# Altium PCB STM32F302VC_EVM.PcbDoc (part 16 of 19)
Units mil, origin at the board's own origin, x right, y up, seen from the top; angles counter-clockwise.
Board outline 3937.01 x 3937.01 mil, 2 copper layers (Top Layer, Bottom Layer); 117 components, 166 nets, 602 pads, 373 vias.
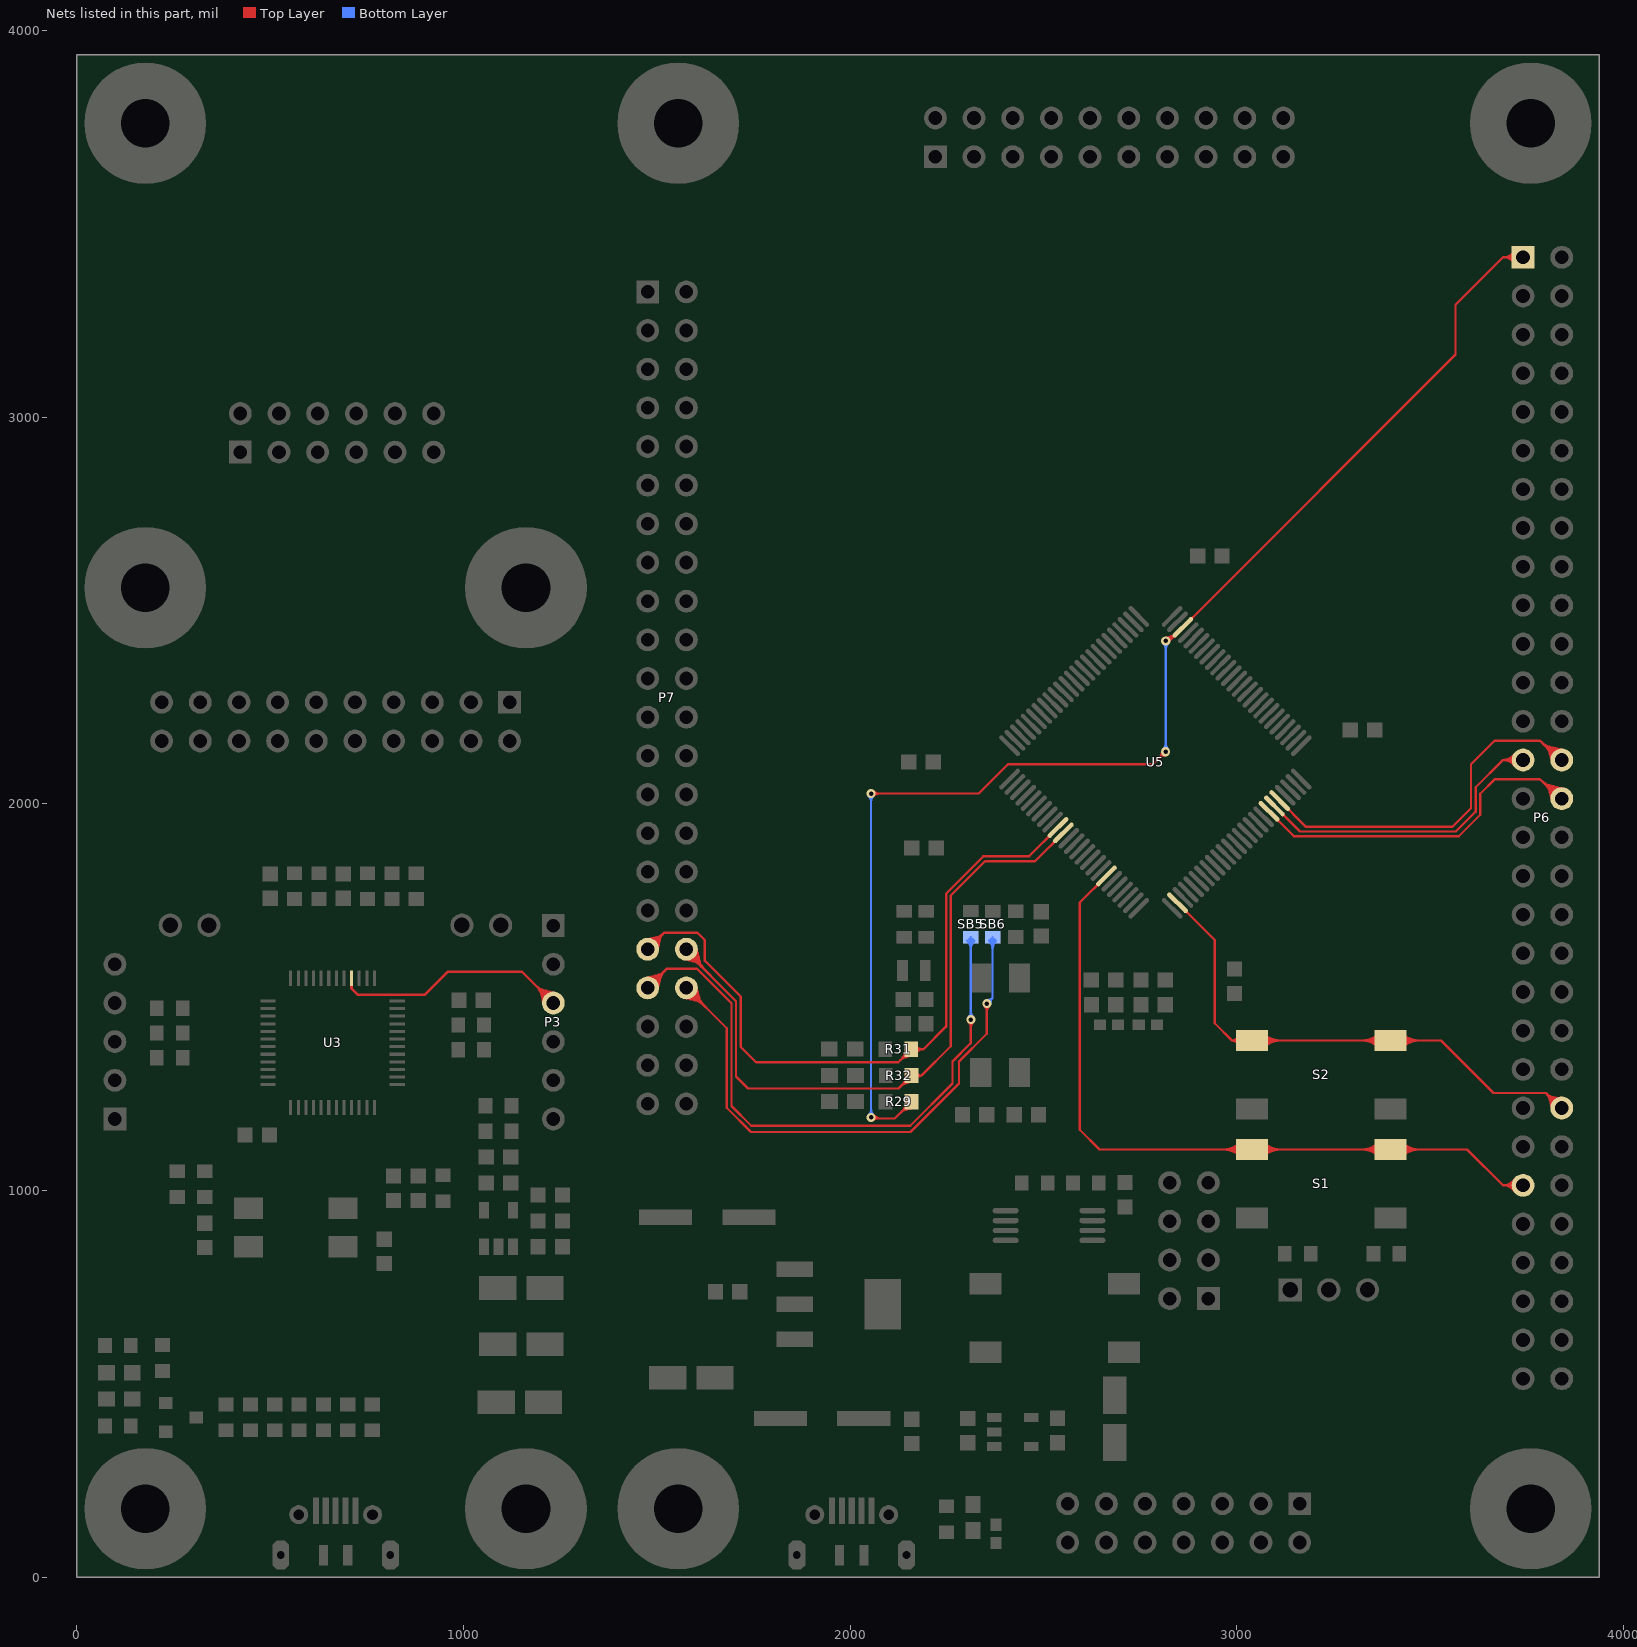
[diagram p16: the nets of this part, all layers, seen from the top]

## Via types
v1: diameter 23.62, hole 11.81, Top Layer to Bottom Layer, tented both sides, 372 vias
v2: diameter 50, hole 28, Top Layer to Bottom Layer, tented both sides, 1 vias

## Nets (pads, with @x,y where several pads share a name; then routed paths per layer and width w, separated by ;. In a path a pad name is that pad's centre, name@x,y a point inside that pad or via, vN(x,y) a via of type N, cw(c..) or ccw(c..) an arc to the next point about the centre after c; other vN are vias at no path point) (continued)
PE13: P6.30 U5.44 | length 2796
  Top Layer w6: U5.44@3083.07,1980.62 3147.35,1916.34 3573.97,1916.34 3629.51,1971.87 3629.51,2026.16 3667.32,2063.98 3783.46,2063.98 P6.30@3837.11,2010.33 ; U5.44@3103.95,1956.83 cw(c3103.95,1949.82) 3108.91,1954.78 ; U5.44@3103.95,1956.83 cw(c3103.95,1949.82) 3108.91,1954.78 ; U5.44@3103.95,1956.83 cw(c3103.95,1949.82) 3108.91,1954.78 ; U5.44@3106.85,1959.74 ccw(c3113.87,1959.74) 3108.91,1954.78 ; U5.44@3106.85,1959.74 ccw(c3113.87,1959.74) 3108.91,1954.78 ; U5.44@3106.85,1959.74 ccw(c3113.87,1959.74) 3108.91,1954.78 ; 3784.45,2062.99 ccw(c3840.16,2118.69) P6.30@3840.16,2039.91 ; 3784.45,2062.99 ccw(c3840.16,2118.69) P6.30@3840.16,2039.91 ; 3784.45,2062.99 ccw(c3840.16,2118.69) P6.30@3840.16,2039.91 ; 3794.7,2052.74 ccw(c3840.16,2098.2) P6.30@3840.16,2033.91 ; 3794.7,2052.74 ccw(c3840.16,2098.2) P6.30@3840.16,2033.91 ; 3794.7,2052.74 ccw(c3840.16,2098.2) P6.30@3840.16,2033.91 ; 3799.19,2048.25 cw(c3764.32,2013.39) P6.30@3813.63,2013.39 ; 3799.19,2048.25 cw(c3764.32,2013.39) P6.30@3813.63,2013.39 ; 3799.19,2048.25 cw(c3764.32,2013.39) P6.30@3813.63,2013.39 ; 3804.94,2042.5 ccw(c3840.16,2077.72) P6.30@3840.16,2027.91 ; 3804.94,2042.5 ccw(c3840.16,2077.72) P6.30@3840.16,2027.91 ; 3804.94,2042.5 ccw(c3840.16,2077.72) P6.30@3840.16,2027.91 ; 3806.97,2038.25 ccw(c3844.2,2048.23) P6.30@3839.76,2009.94 ; 3806.97,2038.25 ccw(c3844.2,2048.23) P6.30@3839.76,2009.94 ; 3806.97,2038.25 ccw(c3844.2,2048.23) P6.30@3839.76,2009.94 ; 3808.64,2048.13 cw(c3796.21,2000.43) P6.30@3843.49,2014.37 ; 3808.64,2048.13 cw(c3796.21,2000.43) P6.30@3843.49,2014.37 ; 3808.64,2048.13 cw(c3796.21,2000.43) P6.30@3843.49,2014.37 ; 3809.25,2029.72 ccw(c3843.11,2038.79) P6.30@3839.07,2003.98 ; 3809.25,2029.72 ccw(c3843.11,2038.79) P6.30@3839.07,2003.98 ; 3809.25,2029.72 ccw(c3843.11,2038.79) P6.30@3839.07,2003.98 ; 3809.43,2038.01 cw(c3784.8,2013.39) P6.30@3819.63,2013.39 ; 3809.43,2038.01 cw(c3784.8,2013.39) P6.30@3819.63,2013.39 ; 3809.43,2038.01 cw(c3784.8,2013.39) P6.30@3819.63,2013.39 ; 3811.32,2041.64 cw(c3801.92,2006.56) P6.30@3837.67,2012.94 ; 3811.32,2041.64 cw(c3801.92,2006.56) P6.30@3837.67,2012.94 ; 3811.32,2041.64 cw(c3801.92,2006.56) P6.30@3837.67,2012.94 ; 3811.54,2021.19 ccw(c3842.01,2029.35) P6.30@3838.37,1998.02 ; 3811.54,2021.19 ccw(c3842.01,2029.35) P6.30@3838.37,1998.02 ; 3811.54,2021.19 ccw(c3842.01,2029.35) P6.30@3838.37,1998.02 ; 3814.65,2034.75 ccw(c3818.83,2050.33) P6.30@3826.89,2036.36 ; 3814.65,2034.75 ccw(c3818.83,2050.33) P6.30@3826.89,2036.36 ; 3814.65,2034.75 ccw(c3818.83,2050.33) P6.30@3826.89,2036.36 ; 3814.86,2034.69 cw(c3809,2012.83) P6.30@3831.63,2013.23 ; 3814.86,2034.69 cw(c3809,2012.83) P6.30@3831.63,2013.23 ; 3814.86,2034.69 cw(c3809,2012.83) P6.30@3831.63,2013.23 ; 3815.18,2032.26 ccw(c3840.16,2057.23) P6.30@3840.16,2021.91 ; 3815.18,2032.26 ccw(c3840.16,2057.23) P6.30@3840.16,2021.91 ; 3815.18,2032.26 ccw(c3840.16,2057.23) P6.30@3840.16,2021.91 ; 3818.91,2045.45 cw(c3808.09,2003.93) P6.30@3849.24,2016.06 ; 3818.91,2045.45 cw(c3808.09,2003.93) P6.30@3849.24,2016.06 ; 3818.91,2045.45 cw(c3808.09,2003.93) P6.30@3849.24,2016.06 ; 3820.43,2039.2 cw(c3812.18,2008.39) P6.30@3843.58,2014 ; 3820.43,2039.2 cw(c3812.18,2008.39) P6.30@3843.58,2014 ; 3820.43,2039.2 cw(c3812.18,2008.39) P6.30@3843.58,2014 ; 3829.18,2042.77 cw(c3819.97,2007.43) P6.30@3855,2017.76 ; 3829.18,2042.77 cw(c3819.97,2007.43) P6.30@3855,2017.76 ; 3829.18,2042.77 cw(c3819.97,2007.43) P6.30@3855,2017.76
PE14: P6.27 U5.45 | length 1198
  Top Layer w6: U5.45@3096.99,1994.54 3163.19,1928.34 3565.94,1928.34 3617.51,1979.9 3617.51,2042.9 3687.99,2113.39 ; P6.27@3740.16,2113.39 3687.99,2113.39 ; U5.45@3117.87,1970.75 cw(c3117.87,1963.74) 3122.83,1968.7 ; U5.45@3117.87,1970.75 cw(c3117.87,1963.74) 3122.83,1968.7 ; U5.45@3117.87,1970.75 cw(c3117.87,1963.74) 3122.83,1968.7 ; U5.45@3120.77,1973.66 ccw(c3127.79,1973.66) 3122.83,1968.7 ; U5.45@3120.77,1973.66 ccw(c3127.79,1973.66) 3122.83,1968.7 ; U5.45@3120.77,1973.66 ccw(c3127.79,1973.66) 3122.83,1968.7 ; 3687.99,2113.39 cw(c3687.99,2075.36) P6.27@3718.72,2097.76 ; 3687.99,2113.39 ccw(c3687.99,2151.41) P6.27@3718.72,2129.01 ; 3687.99,2113.39 ccw(c3687.99,2151.41) P6.27@3718.72,2129.01 ; 3687.99,2113.39 cw(c3687.99,2075.36) P6.27@3718.72,2097.76 ; 3687.99,2113.39 ccw(c3687.99,2151.41) P6.27@3718.72,2129.01 ; 3687.99,2113.39 cw(c3687.99,2075.36) P6.27@3718.72,2097.76 ; 3699.79,2113.39 cw(c3699.79,2083.96) P6.27@3723.57,2101.29 ; 3699.79,2113.39 ccw(c3699.79,2142.81) P6.27@3723.57,2125.48 ; 3699.79,2113.39 ccw(c3699.79,2142.81) P6.27@3723.57,2125.48 ; 3699.79,2113.39 cw(c3699.79,2083.96) P6.27@3723.57,2101.29 ; 3699.79,2113.39 ccw(c3699.79,2142.81) P6.27@3723.57,2125.48 ; 3699.79,2113.39 cw(c3699.79,2083.96) P6.27@3723.57,2101.29
PE15: P6.28 U5.46 | length 2845.5
  Top Layer w6: U5.46@3110.91,2008.46 3179.03,1940.34 3557.09,1940.34 3605.51,1988.76 3605.51,2102.55 3666.34,2163.39 3783.46,2163.39 ; P6.28@3836.81,2110.04 3783.46,2163.39 ; U5.46@3131.79,1984.67 cw(c3131.79,1977.66) 3136.75,1982.62 ; U5.46@3131.79,1984.67 cw(c3131.79,1977.66) 3136.75,1982.62 ; U5.46@3131.79,1984.67 cw(c3131.79,1977.66) 3136.75,1982.62 ; U5.46@3134.69,1987.58 ccw(c3141.71,1987.58) 3136.75,1982.62 ; U5.46@3134.69,1987.58 ccw(c3141.71,1987.58) 3136.75,1982.62 ; U5.46@3134.69,1987.58 ccw(c3141.71,1987.58) 3136.75,1982.62 ; 3783.47,2163.38 ccw(c3840.13,2220.04) P6.28@3840.15,2139.91 ; 3783.47,2163.38 ccw(c3840.13,2220.04) P6.28@3840.15,2139.91 ; 3783.47,2163.38 ccw(c3840.13,2220.04) P6.28@3840.15,2139.91 ; 3793.71,2153.14 ccw(c3840.13,2199.57) P6.28@3840.15,2133.91 ; 3793.71,2153.14 ccw(c3840.13,2199.57) P6.28@3840.15,2133.91 ; 3793.71,2153.14 ccw(c3840.13,2199.57) P6.28@3840.15,2133.91 ; 3799.6,2147.25 cw(c3765.74,2113.39) P6.28@3813.63,2113.39 ; 3799.6,2147.25 cw(c3765.74,2113.39) P6.28@3813.63,2113.39 ; 3799.6,2147.25 cw(c3765.74,2113.39) P6.28@3813.63,2113.39 ; 3803.94,2142.91 ccw(c3840.14,2179.1) P6.28@3840.15,2127.91 ; 3803.94,2142.91 ccw(c3840.14,2179.1) P6.28@3840.15,2127.91 ; 3803.94,2142.91 ccw(c3840.14,2179.1) P6.28@3840.15,2127.91 ; 3807.05,2137.95 ccw(c3843.84,2147.81) P6.28@3839.79,2109.93 ; 3807.05,2137.95 ccw(c3843.84,2147.81) P6.28@3839.79,2109.93 ; 3807.05,2137.95 ccw(c3843.84,2147.81) P6.28@3839.79,2109.93 ; 3808.14,2148.14 cw(c3795.7,2099.74) P6.28@3843.48,2114.4 ; 3808.14,2148.14 cw(c3795.7,2099.74) P6.28@3843.48,2114.4 ; 3808.14,2148.14 cw(c3795.7,2099.74) P6.28@3843.48,2114.4 ; 3809.31,2129.5 ccw(c3842.84,2138.48) P6.28@3839.15,2103.97 ; 3809.31,2129.5 ccw(c3842.84,2138.48) P6.28@3839.15,2103.97 ; 3809.31,2129.5 ccw(c3842.84,2138.48) P6.28@3839.15,2103.97 ; 3809.85,2137 cw(c3786.23,2113.39) P6.28@3819.63,2113.39 ; 3809.85,2137 cw(c3786.23,2113.39) P6.28@3819.63,2113.39 ; 3809.85,2137 cw(c3786.23,2113.39) P6.28@3819.63,2113.39 ; 3810.96,2141.73 cw(c3801.42,2106.09) P6.28@3837.67,2112.92 ; 3810.96,2141.73 cw(c3801.42,2106.09) P6.28@3837.67,2112.92 ; 3810.96,2141.73 cw(c3801.42,2106.09) P6.28@3837.67,2112.92 ; 3811.58,2121.05 ccw(c3841.84,2129.16) P6.28@3838.51,2098 ; 3811.58,2121.05 ccw(c3841.84,2129.16) P6.28@3838.51,2098 ; 3811.58,2121.05 ccw(c3841.84,2129.16) P6.28@3838.51,2098 ; 3814.18,2132.67 ccw(c3840.14,2158.63) P6.28@3840.16,2121.91 ; 3814.18,2132.67 ccw(c3840.14,2158.63) P6.28@3840.16,2121.91 ; 3814.18,2132.67 ccw(c3840.14,2158.63) P6.28@3840.16,2121.91 ; 3814.45,2134.79 cw(c3808.46,2112.39) P6.28@3831.63,2113.12 ; 3814.45,2134.79 cw(c3808.46,2112.39) P6.28@3831.63,2113.12 ; 3814.45,2134.79 cw(c3808.46,2112.39) P6.28@3831.63,2113.12 ; 3814.65,2134.74 ccw(c3818.82,2150.33) P6.28@3826.89,2136.36 ; 3814.65,2134.74 ccw(c3818.82,2150.33) P6.28@3826.89,2136.36 ; 3814.65,2134.74 ccw(c3818.82,2150.33) P6.28@3826.89,2136.36 ; 3818.52,2145.48 cw(c3807.7,2103.42) P6.28@3849.21,2116.17 ; 3818.52,2145.48 cw(c3807.7,2103.42) P6.28@3849.21,2116.17 ; 3818.52,2145.48 cw(c3807.7,2103.42) P6.28@3849.21,2116.17 ; 3820.17,2139.26 cw(c3811.82,2108.05) P6.28@3843.57,2114.03 ; 3820.17,2139.26 cw(c3811.82,2108.05) P6.28@3843.57,2114.03 ; 3820.17,2139.26 cw(c3811.82,2108.05) P6.28@3843.57,2114.03 ; 3828.89,2142.81 cw(c3819.71,2107.11) P6.28@3854.95,2117.93 ; 3828.89,2142.81 cw(c3819.71,2107.11) P6.28@3854.95,2117.93 ; 3828.89,2142.81 cw(c3819.71,2107.11) P6.28@3854.95,2117.93
PF0: P7.37 SB5.2 | length 3910.9
  Top Layer w6: P7.37@1476.38,1524.02 1526.18,1573.82 1603.35,1573.82 1692.87,1484.29 1692.87,1218.75 1744.3,1167.32 2155.27,1167.32 2264.53,1276.57 2264.53,1333.66 2312.01,1381.14 v1(2312.01,1441.93) ; P7.37@1461.22,1527.12 cw(c1494.37,1520.33) 1485.61,1553.02 ; P7.37@1461.22,1527.12 cw(c1494.37,1520.33) 1485.61,1553.02 ; P7.37@1461.22,1527.12 cw(c1494.37,1520.33) 1485.61,1553.02 ; P7.37@1467.1,1525.92 cw(c1505.01,1518.15) 1494.99,1555.53 ; P7.37@1467.1,1525.92 cw(c1505.01,1518.15) 1494.99,1555.53 ; P7.37@1467.1,1525.92 cw(c1505.01,1518.15) 1494.99,1555.53 ; P7.37@1472.92,1524.27 cw(c1500.72,1522.2) 1493.5,1549.13 ; P7.37@1472.92,1524.27 cw(c1500.72,1522.2) 1493.5,1549.13 ; P7.37@1472.92,1524.27 cw(c1500.72,1522.2) 1493.5,1549.13 ; P7.37@1472.98,1524.71 cw(c1515.64,1515.98) 1504.37,1558.04 ; P7.37@1472.98,1524.71 cw(c1515.64,1515.98) 1504.37,1558.04 ; P7.37@1472.98,1524.71 cw(c1515.64,1515.98) 1504.37,1558.04 ; P7.37@1476.19,1526.54 ccw(c1473.9,1557.29) 1503.68,1549.31 ; P7.37@1476.19,1526.54 ccw(c1473.9,1557.29) 1503.68,1549.31 ; P7.37@1476.19,1526.54 ccw(c1473.9,1557.29) 1503.68,1549.31 ; P7.37@1476.38,1538.54 ccw(c1476.38,1573.62) 1501.18,1548.82 ; P7.37@1476.38,1538.54 ccw(c1476.38,1573.62) 1501.18,1548.82 ; P7.37@1476.38,1538.54 ccw(c1476.38,1573.62) 1501.18,1548.82 ; P7.37@1476.38,1544.54 ccw(c1476.38,1594.1) 1511.42,1559.06 ; P7.37@1476.38,1544.54 ccw(c1476.38,1594.1) 1511.42,1559.06 ; P7.37@1476.38,1544.54 ccw(c1476.38,1594.1) 1511.42,1559.06 ; P7.37@1476.38,1550.54 ccw(c1476.38,1614.59) 1521.66,1569.3 ; P7.37@1476.38,1550.54 ccw(c1476.38,1614.59) 1521.66,1569.3 ; P7.37@1476.38,1550.54 ccw(c1476.38,1614.59) 1521.66,1569.3 ; P7.37@1476.64,1520.55 ccw(c1474.56,1548.36) 1501.49,1541.14 ; P7.37@1476.64,1520.55 ccw(c1474.56,1548.36) 1501.49,1541.14 ; P7.37@1476.64,1520.55 ccw(c1474.56,1548.36) 1501.49,1541.14 ; P7.37@1477.07,1520.61 ccw(c1468.34,1563.28) 1510.41,1552.01 ; P7.37@1477.07,1520.61 ccw(c1468.34,1563.28) 1510.41,1552.01 ; P7.37@1477.07,1520.61 ccw(c1468.34,1563.28) 1510.41,1552.01 ; P7.37@1478.28,1514.74 ccw(c1470.52,1552.65) 1507.89,1542.63 ; P7.37@1478.28,1514.74 ccw(c1470.52,1552.65) 1507.89,1542.63 ; P7.37@1478.28,1514.74 ccw(c1470.52,1552.65) 1507.89,1542.63 ; P7.37@1478.9,1523.83 cw(c1509.65,1521.53) 1501.67,1551.32 ; P7.37@1478.9,1523.83 cw(c1509.65,1521.53) 1501.67,1551.32 ; P7.37@1478.9,1523.83 cw(c1509.65,1521.53) 1501.67,1551.32 ; P7.37@1479.48,1508.86 ccw(c1472.69,1542.01) 1505.38,1533.25 ; P7.37@1479.48,1508.86 ccw(c1472.69,1542.01) 1505.38,1533.25 ; P7.37@1479.48,1508.86 ccw(c1472.69,1542.01) 1505.38,1533.25 ; P7.37@1490.91,1524.02 cw(c1525.98,1524.02) 1501.18,1548.82 ; P7.37@1490.91,1524.02 cw(c1525.98,1524.02) 1501.18,1548.82 ; P7.37@1490.91,1524.02 cw(c1525.98,1524.02) 1501.18,1548.82 ; P7.37@1496.91,1524.02 cw(c1546.46,1524.02) 1511.42,1559.06 ; P7.37@1496.91,1524.02 cw(c1546.46,1524.02) 1511.42,1559.06 ; P7.37@1496.91,1524.02 cw(c1546.46,1524.02) 1511.42,1559.06 ; P7.37@1502.91,1524.02 cw(c1566.95,1524.02) 1521.66,1569.3 ; P7.37@1502.91,1524.02 cw(c1566.95,1524.02) 1521.66,1569.3 ; P7.37@1502.91,1524.02 cw(c1566.95,1524.02) 1521.66,1569.3 ; v1@2305.78,1435.7 cw(c2290.74,1420.66) 2312.01,1420.66 ; v1@2305.78,1435.7 cw(c2290.74,1420.66) 2312.01,1420.66 ; v1@2305.78,1435.7 cw(c2290.74,1420.66) 2312.01,1420.66 ; 2312.01,1420.66 cw(c2333.28,1420.66) v1@2318.24,1435.7 ; 2312.01,1420.66 cw(c2333.28,1420.66) v1@2318.24,1435.7 ; 2312.01,1420.66 cw(c2333.28,1420.66) v1@2318.24,1435.7
  Bottom Layer w6: v1(2312.01,1441.93) SB5.2@2312.01,1655.23 ; SB5.2@2302.82,1646.03 cw(c2280.62,1623.84) 2312.01,1623.84 ; SB5.2@2302.82,1646.03 cw(c2280.62,1623.84) 2312.01,1623.84 ; SB5.2@2302.82,1646.03 cw(c2280.62,1623.84) 2312.01,1623.84 ; v1@2305.78,1448.16 ccw(c2290.74,1463.2) 2312.01,1463.2 ; v1@2305.78,1448.16 ccw(c2290.74,1463.2) 2312.01,1463.2 ; v1@2305.78,1448.16 ccw(c2290.74,1463.2) 2312.01,1463.2 ; SB5.2@2307.06,1650.28 cw(c2295.11,1638.33) 2312.01,1638.33 ; SB5.2@2307.06,1650.28 cw(c2295.11,1638.33) 2312.01,1638.33 ; SB5.2@2307.06,1650.28 cw(c2295.11,1638.33) 2312.01,1638.33 ; 2312.01,1463.2 ccw(c2333.28,1463.2) v1@2318.24,1448.16 ; 2312.01,1463.2 ccw(c2333.28,1463.2) v1@2318.24,1448.16 ; 2312.01,1463.2 ccw(c2333.28,1463.2) v1@2318.24,1448.16 ; 2312.01,1623.84 cw(c2343.39,1623.84) SB5.2@2321.2,1646.03 ; 2312.01,1623.84 cw(c2343.39,1623.84) SB5.2@2321.2,1646.03 ; 2312.01,1623.84 cw(c2343.39,1623.84) SB5.2@2321.2,1646.03 ; 2312.01,1638.33 cw(c2328.91,1638.33) SB5.2@2316.96,1650.28 ; 2312.01,1638.33 cw(c2328.91,1638.33) SB5.2@2316.96,1650.28 ; 2312.01,1638.33 cw(c2328.91,1638.33) SB5.2@2316.96,1650.28
PF1: P7.38 SB6.2 | length 3778.1
  Top Layer w6: P7.38@1576.38,1524.02 1680.87,1419.52 1680.87,1213.78 1743.54,1151.11 2156.04,1151.11 2281.5,1276.57 2281.5,1333.66 2353.35,1405.51 v1(2353.35,1483.27) ; P7.38@1561.22,1520.91 ccw(c1594.37,1527.7) 1585.61,1495.01 ; P7.38@1561.22,1520.91 ccw(c1594.37,1527.7) 1585.61,1495.01 ; P7.38@1561.22,1520.91 ccw(c1594.37,1527.7) 1585.61,1495.01 ; P7.38@1567.1,1522.12 ccw(c1605.01,1529.88) 1594.99,1492.5 ; P7.38@1567.1,1522.12 ccw(c1605.01,1529.88) 1594.99,1492.5 ; P7.38@1567.1,1522.12 ccw(c1605.01,1529.88) 1594.99,1492.5 ; P7.38@1572.92,1523.76 ccw(c1600.72,1525.83) 1593.5,1498.9 ; P7.38@1572.92,1523.76 ccw(c1600.72,1525.83) 1593.5,1498.9 ; P7.38@1572.92,1523.76 ccw(c1600.72,1525.83) 1593.5,1498.9 ; P7.38@1572.98,1523.32 ccw(c1615.64,1532.06) 1604.37,1489.99 ; P7.38@1572.98,1523.32 ccw(c1615.64,1532.06) 1604.37,1489.99 ; P7.38@1572.98,1523.32 ccw(c1615.64,1532.06) 1604.37,1489.99 ; P7.38@1576.19,1521.5 cw(c1573.9,1490.74) 1603.68,1498.73 ; P7.38@1576.19,1521.5 cw(c1573.9,1490.74) 1603.68,1498.73 ; P7.38@1576.19,1521.5 cw(c1573.9,1490.74) 1603.68,1498.73 ; P7.38@1576.38,1497.49 cw(c1576.38,1433.45) 1621.66,1478.73 ; P7.38@1576.38,1497.49 cw(c1576.38,1433.45) 1621.66,1478.73 ; P7.38@1576.38,1497.49 cw(c1576.38,1433.45) 1621.66,1478.73 ; P7.38@1576.38,1503.49 cw(c1576.38,1453.93) 1611.42,1488.97 ; P7.38@1576.38,1503.49 cw(c1576.38,1453.93) 1611.42,1488.97 ; P7.38@1576.38,1503.49 cw(c1576.38,1453.93) 1611.42,1488.97 ; P7.38@1576.38,1509.49 cw(c1576.38,1474.42) 1601.18,1499.22 ; P7.38@1576.38,1509.49 cw(c1576.38,1474.42) 1601.18,1499.22 ; P7.38@1576.38,1509.49 cw(c1576.38,1474.42) 1601.18,1499.22 ; P7.38@1576.64,1527.48 cw(c1574.56,1499.67) 1601.49,1506.89 ; P7.38@1576.64,1527.48 cw(c1574.56,1499.67) 1601.49,1506.89 ; P7.38@1576.64,1527.48 cw(c1574.56,1499.67) 1601.49,1506.89 ; P7.38@1577.07,1527.42 cw(c1568.34,1484.75) 1610.41,1496.02 ; P7.38@1577.07,1527.42 cw(c1568.34,1484.75) 1610.41,1496.02 ; P7.38@1577.07,1527.42 cw(c1568.34,1484.75) 1610.41,1496.02 ; P7.38@1578.28,1533.3 cw(c1570.52,1495.39) 1607.89,1505.4 ; P7.38@1578.28,1533.3 cw(c1570.52,1495.39) 1607.89,1505.4 ; P7.38@1578.28,1533.3 cw(c1570.52,1495.39) 1607.89,1505.4 ; P7.38@1578.9,1524.2 ccw(c1609.65,1526.5) 1601.67,1496.71 ; P7.38@1578.9,1524.2 ccw(c1609.65,1526.5) 1601.67,1496.71 ; P7.38@1578.9,1524.2 ccw(c1609.65,1526.5) 1601.67,1496.71 ; P7.38@1579.48,1539.17 cw(c1572.69,1506.02) 1605.38,1514.78 ; P7.38@1579.48,1539.17 cw(c1572.69,1506.02) 1605.38,1514.78 ; P7.38@1579.48,1539.17 cw(c1572.69,1506.02) 1605.38,1514.78 ; P7.38@1590.91,1524.02 ccw(c1625.98,1524.02) 1601.18,1499.22 ; P7.38@1590.91,1524.02 ccw(c1625.98,1524.02) 1601.18,1499.22 ; P7.38@1590.91,1524.02 ccw(c1625.98,1524.02) 1601.18,1499.22 ; P7.38@1596.91,1524.02 ccw(c1646.46,1524.02) 1611.42,1488.97 ; P7.38@1596.91,1524.02 ccw(c1646.46,1524.02) 1611.42,1488.97 ; P7.38@1596.91,1524.02 ccw(c1646.46,1524.02) 1611.42,1488.97 ; P7.38@1602.91,1524.02 ccw(c1666.95,1524.02) 1621.66,1478.73 ; P7.38@1602.91,1524.02 ccw(c1666.95,1524.02) 1621.66,1478.73 ; P7.38@1602.91,1524.02 ccw(c1666.95,1524.02) 1621.66,1478.73 ; v1@2347.12,1477.04 cw(c2332.07,1462) 2353.35,1462 ; v1@2347.12,1477.04 cw(c2332.07,1462) 2353.35,1462 ; v1@2347.12,1477.04 cw(c2332.07,1462) 2353.35,1462 ; 2353.35,1462 cw(c2374.62,1462) v1@2359.58,1477.04 ; 2353.35,1462 cw(c2374.62,1462) v1@2359.58,1477.04 ; 2353.35,1462 cw(c2374.62,1462) v1@2359.58,1477.04
  Bottom Layer w6: v1(2353.35,1483.27) 2368.11,1498.03 ; SB6.2@2368.11,1654.88 2368.11,1498.03 ; v1@2353.46,1492.08 ccw(c2353.73,1512.41) 2368.11,1498.03 ; v1@2353.46,1492.08 ccw(c2353.73,1512.41) 2368.11,1498.03 ; v1@2353.46,1492.08 ccw(c2353.73,1512.41) 2368.11,1498.03 ; SB6.2@2358.92,1645.69 cw(c2336.73,1623.5) 2368.11,1623.5 ; SB6.2@2358.92,1645.69 cw(c2336.73,1623.5) 2368.11,1623.5 ; SB6.2@2358.92,1645.69 cw(c2336.73,1623.5) 2368.11,1623.5 ; v1@2362.16,1483.38 cw(c2382.48,1483.66) 2368.11,1498.03 ; v1@2362.16,1483.38 cw(c2382.48,1483.66) 2368.11,1498.03 ; v1@2362.16,1483.38 cw(c2382.48,1483.66) 2368.11,1498.03 ; SB6.2@2363.16,1649.93 cw(c2351.21,1637.98) 2368.11,1637.98 ; SB6.2@2363.16,1649.93 cw(c2351.21,1637.98) 2368.11,1637.98 ; SB6.2@2363.16,1649.93 cw(c2351.21,1637.98) 2368.11,1637.98 ; 2368.11,1623.5 cw(c2399.49,1623.5) SB6.2@2377.3,1645.69 ; 2368.11,1623.5 cw(c2399.49,1623.5) SB6.2@2377.3,1645.69 ; 2368.11,1623.5 cw(c2399.49,1623.5) SB6.2@2377.3,1645.69 ; 2368.11,1637.98 cw(c2385.01,1637.98) SB6.2@2373.06,1649.93 ; 2368.11,1637.98 cw(c2385.01,1637.98) SB6.2@2373.06,1649.93 ; 2368.11,1637.98 cw(c2385.01,1637.98) SB6.2@2373.06,1649.93
PF2: P6.49 S1.3 S1.4 U5.19 | length 4838.3
  Top Layer w6: U5.19@2662.7,1813.58 2593.92,1744.8 2593.92,1157.06 2644.69,1106.3 3068.07,1106.3 3426.34,1106.3 3595.08,1106.3 3687.99,1013.39 ; P6.49@3740.16,1013.39 3687.99,1013.39 ; 2636.86,1787.74 cw(c2641.82,1782.78) U5.19@2641.82,1789.8 ; 2636.86,1787.74 ccw(c2631.9,1792.7) U5.19@2638.92,1792.7 ; 2636.86,1787.74 ccw(c2631.9,1792.7) U5.19@2638.92,1792.7 ; 2636.86,1787.74 cw(c2641.82,1782.78) U5.19@2641.82,1789.8 ; 2636.86,1787.74 ccw(c2631.9,1792.7) U5.19@2638.92,1792.7 ; 2636.86,1787.74 cw(c2641.82,1782.78) U5.19@2641.82,1789.8 ; 2966.3,1106.3 cw(c2966.3,1047.01) S1.4@3008.22,1088.93 ; 2966.3,1106.3 ccw(c2966.3,1165.59) S1.4@3008.22,1123.67 ; 2966.3,1106.3 ccw(c2966.3,1165.59) S1.4@3008.22,1123.67 ; 2966.3,1106.3 cw(c2966.3,1047.01) S1.4@3008.22,1088.93 ; 2966.3,1106.3 ccw(c2966.3,1165.59) S1.4@3008.22,1123.67 ; 2966.3,1106.3 cw(c2966.3,1047.01) S1.4@3008.22,1088.93 ; 2980.78,1106.3 cw(c2980.78,1061.49) S1.4@3012.47,1093.18 ; 2980.78,1106.3 ccw(c2980.78,1151.1) S1.4@3012.47,1119.42 ; 2980.78,1106.3 ccw(c2980.78,1151.1) S1.4@3012.47,1119.42 ; 2980.78,1106.3 cw(c2980.78,1061.49) S1.4@3012.47,1093.18 ; 2980.78,1106.3 ccw(c2980.78,1151.1) S1.4@3012.47,1119.42 ; 2980.78,1106.3 cw(c2980.78,1061.49) S1.4@3012.47,1093.18 ; 2995.27,1106.3 cw(c2995.27,1075.98) S1.4@3016.71,1097.42 ; 2995.27,1106.3 ccw(c2995.27,1136.62) S1.4@3016.71,1115.18 ; 2995.27,1106.3 ccw(c2995.27,1136.62) S1.4@3016.71,1115.18 ; 2995.27,1106.3 cw(c2995.27,1075.98) S1.4@3016.71,1097.42 ; 2995.27,1106.3 ccw(c2995.27,1136.62) S1.4@3016.71,1115.18 ; 2995.27,1106.3 cw(c2995.27,1075.98) S1.4@3016.71,1097.42 ; S1.4@3062.03,1097.42 cw(c3083.47,1075.98) 3083.47,1106.3 ; S1.4@3062.03,1097.42 cw(c3083.47,1075.98) 3083.47,1106.3 ; S1.4@3062.03,1097.42 cw(c3083.47,1075.98) 3083.47,1106.3 ; S1.4@3062.03,1115.18 ccw(c3083.47,1136.62) 3083.47,1106.3 ; S1.4@3062.03,1115.18 ccw(c3083.47,1136.62) 3083.47,1106.3 ; S1.4@3062.03,1115.18 ccw(c3083.47,1136.62) 3083.47,1106.3 ; S1.4@3066.27,1093.18 cw(c3097.95,1061.49) 3097.95,1106.3 ; S1.4@3066.27,1093.18 cw(c3097.95,1061.49) 3097.95,1106.3 ; S1.4@3066.27,1093.18 cw(c3097.95,1061.49) 3097.95,1106.3 ; S1.4@3066.27,1119.42 ccw(c3097.95,1151.1) 3097.95,1106.3 ; S1.4@3066.27,1119.42 ccw(c3097.95,1151.1) 3097.95,1106.3 ; S1.4@3066.27,1119.42 ccw(c3097.95,1151.1) 3097.95,1106.3 ; S1.4@3070.52,1088.93 cw(c3112.44,1047.01) 3112.44,1106.3 ; S1.4@3070.52,1088.93 cw(c3112.44,1047.01) 3112.44,1106.3 ; S1.4@3070.52,1088.93 cw(c3112.44,1047.01) 3112.44,1106.3 ; S1.4@3070.52,1123.67 ccw(c3112.44,1165.59) 3112.44,1106.3 ; S1.4@3070.52,1123.67 ccw(c3112.44,1165.59) 3112.44,1106.3 ; S1.4@3070.52,1123.67 ccw(c3112.44,1165.59) 3112.44,1106.3 ; 3324.57,1106.3 cw(c3324.57,1047.01) S1.3@3366.49,1088.93 ; 3324.57,1106.3 ccw(c3324.57,1165.59) S1.3@3366.49,1123.67 ; 3324.57,1106.3 ccw(c3324.57,1165.59) S1.3@3366.49,1123.67 ; 3324.57,1106.3 cw(c3324.57,1047.01) S1.3@3366.49,1088.93 ; 3324.57,1106.3 ccw(c3324.57,1165.59) S1.3@3366.49,1123.67 ; 3324.57,1106.3 cw(c3324.57,1047.01) S1.3@3366.49,1088.93 ; 3339.05,1106.3 cw(c3339.05,1061.49) S1.3@3370.74,1093.18 ; 3339.05,1106.3 ccw(c3339.05,1151.1) S1.3@3370.74,1119.42 ; 3339.05,1106.3 ccw(c3339.05,1151.1) S1.3@3370.74,1119.42 ; 3339.05,1106.3 cw(c3339.05,1061.49) S1.3@3370.74,1093.18 ; 3339.05,1106.3 ccw(c3339.05,1151.1) S1.3@3370.74,1119.42 ; 3339.05,1106.3 cw(c3339.05,1061.49) S1.3@3370.74,1093.18 ; 3353.54,1106.3 cw(c3353.54,1075.98) S1.3@3374.98,1097.42 ; 3353.54,1106.3 ccw(c3353.54,1136.62) S1.3@3374.98,1115.18 ; 3353.54,1106.3 ccw(c3353.54,1136.62) S1.3@3374.98,1115.18 ; 3353.54,1106.3 cw(c3353.54,1075.98) S1.3@3374.98,1097.42 ; 3353.54,1106.3 ccw(c3353.54,1136.62) S1.3@3374.98,1115.18 ; 3353.54,1106.3 cw(c3353.54,1075.98) S1.3@3374.98,1097.42 ; S1.3@3420.3,1097.42 cw(c3441.74,1075.98) 3441.74,1106.3 ; S1.3@3420.3,1097.42 cw(c3441.74,1075.98) 3441.74,1106.3 ; S1.3@3420.3,1097.42 cw(c3441.74,1075.98) 3441.74,1106.3 ; S1.3@3420.3,1115.18 ccw(c3441.74,1136.62) 3441.74,1106.3 ; S1.3@3420.3,1115.18 ccw(c3441.74,1136.62) 3441.74,1106.3 ; S1.3@3420.3,1115.18 ccw(c3441.74,1136.62) 3441.74,1106.3 ; S1.3@3424.54,1093.18 cw(c3456.22,1061.49) 3456.22,1106.3 ; S1.3@3424.54,1093.18 cw(c3456.22,1061.49) 3456.22,1106.3 ; S1.3@3424.54,1093.18 cw(c3456.22,1061.49) 3456.22,1106.3 ; S1.3@3424.54,1119.42 ccw(c3456.22,1151.1) 3456.22,1106.3 ; S1.3@3424.54,1119.42 ccw(c3456.22,1151.1) 3456.22,1106.3 ; S1.3@3424.54,1119.42 ccw(c3456.22,1151.1) 3456.22,1106.3 ; S1.3@3428.78,1088.93 cw(c3470.71,1047.01) 3470.71,1106.3 ; S1.3@3428.78,1088.93 cw(c3470.71,1047.01) 3470.71,1106.3 ; S1.3@3428.78,1088.93 cw(c3470.71,1047.01) 3470.71,1106.3 ; S1.3@3428.78,1123.67 ccw(c3470.71,1165.59) 3470.71,1106.3 ; S1.3@3428.78,1123.67 ccw(c3470.71,1165.59) 3470.71,1106.3 ; S1.3@3428.78,1123.67 ccw(c3470.71,1165.59) 3470.71,1106.3 ; 3687.99,1013.39 cw(c3687.99,975.36) P6.49@3718.72,997.76 ; 3687.99,1013.39 ccw(c3687.99,1051.41) P6.49@3718.72,1029.01 ; 3687.99,1013.39 ccw(c3687.99,1051.41) P6.49@3718.72,1029.01 ; 3687.99,1013.39 cw(c3687.99,975.36) P6.49@3718.72,997.76 ; 3687.99,1013.39 ccw(c3687.99,1051.41) P6.49@3718.72,1029.01 ; 3687.99,1013.39 cw(c3687.99,975.36) P6.49@3718.72,997.76 ; 3699.79,1013.39 cw(c3699.79,983.96) P6.49@3723.57,1001.29 ; 3699.79,1013.39 ccw(c3699.79,1042.81) P6.49@3723.57,1025.48 ; 3699.79,1013.39 ccw(c3699.79,1042.81) P6.49@3723.57,1025.48 ; 3699.79,1013.39 cw(c3699.79,983.96) P6.49@3723.57,1001.29 ; 3699.79,1013.39 ccw(c3699.79,1042.81) P6.49@3723.57,1025.48 ; 3699.79,1013.39 cw(c3699.79,983.96) P6.49@3723.57,1001.29
PF4: P6.46 S2.3 S2.4 U5.27 | length 4560.5
  Top Layer w6: U5.27@2846.44,1743.99 2942.68,1647.74 2942.68,1432.32 2987.2,1387.8 ; P6.46@3838.98,1212.2 3799.21,1251.97 ; U5.27@2867.32,1720.2 cw(c2867.32,1713.19) 2872.28,1718.15 ; U5.27@2867.32,1720.2 cw(c2867.32,1713.19) 2872.28,1718.15 ; U5.27@2867.32,1720.2 cw(c2867.32,1713.19) 2872.28,1718.15 ; U5.27@2870.22,1723.11 ccw(c2877.24,1723.11) 2872.28,1718.15 ; U5.27@2870.22,1723.11 ccw(c2877.24,1723.11) 2872.28,1718.15 ; U5.27@2870.22,1723.11 ccw(c2877.24,1723.11) 2872.28,1718.15 ; 2987.21,1387.8 cw(c2987.21,1370.08) S2.4@3003.29,1377.5 ; 2987.21,1387.8 ccw(c2987.21,1405.51) S2.4@3003.29,1398.09 ; 2987.21,1387.8 ccw(c2987.21,1405.51) S2.4@3003.29,1398.09 ; 2987.21,1387.8 cw(c2987.21,1370.08) S2.4@3003.29,1377.5 ; 2987.21,1387.8 ccw(c2987.21,1405.51) S2.4@3003.29,1398.09 ; 2987.21,1387.8 cw(c2987.21,1370.08) S2.4@3003.29,1377.5 ; 2987.2,1387.8 3068.07,1387.8 3426.34,1387.8 3527.56,1387.8 3663.39,1251.97 3799.21,1251.97 ; 2996.58,1387.8 cw(c2996.58,1374.41) S2.4@3008.74,1380.02 ; 2996.58,1387.8 ccw(c2996.58,1401.18) S2.4@3008.74,1395.57 ; 2996.58,1387.8 ccw(c2996.58,1401.18) S2.4@3008.74,1395.57 ; 2996.58,1387.8 cw(c2996.58,1374.41) S2.4@3008.74,1380.02 ; 2996.58,1387.8 ccw(c2996.58,1401.18) S2.4@3008.74,1395.57 ; 2996.58,1387.8 cw(c2996.58,1374.41) S2.4@3008.74,1380.02 ; S2.4@3062.03,1378.91 cw(c3083.47,1357.48) 3083.47,1387.8 ; S2.4@3062.03,1378.91 cw(c3083.47,1357.48) 3083.47,1387.8 ; S2.4@3062.03,1378.91 cw(c3083.47,1357.48) 3083.47,1387.8 ; S2.4@3062.03,1396.68 ccw(c3083.47,1418.12) 3083.47,1387.8 ; S2.4@3062.03,1396.68 ccw(c3083.47,1418.12) 3083.47,1387.8 ; S2.4@3062.03,1396.68 ccw(c3083.47,1418.12) 3083.47,1387.8 ; S2.4@3066.27,1374.67 cw(c3097.95,1342.99) 3097.95,1387.8 ; S2.4@3066.27,1374.67 cw(c3097.95,1342.99) 3097.95,1387.8 ; S2.4@3066.27,1374.67 cw(c3097.95,1342.99) 3097.95,1387.8 ; S2.4@3066.27,1400.92 ccw(c3097.96,1432.6) 3097.96,1387.8 ; S2.4@3066.27,1400.92 ccw(c3097.96,1432.6) 3097.96,1387.8 ; S2.4@3066.27,1400.92 ccw(c3097.96,1432.6) 3097.96,1387.8 ; S2.4@3070.52,1370.43 cw(c3112.44,1328.5) 3112.44,1387.8 ; S2.4@3070.52,1370.43 cw(c3112.44,1328.5) 3112.44,1387.8 ; S2.4@3070.52,1370.43 cw(c3112.44,1328.5) 3112.44,1387.8 ; S2.4@3070.52,1405.16 ccw(c3112.44,1447.09) 3112.44,1387.8 ; S2.4@3070.52,1405.16 ccw(c3112.44,1447.09) 3112.44,1387.8 ; S2.4@3070.52,1405.16 ccw(c3112.44,1447.09) 3112.44,1387.8 ; 3324.57,1387.8 cw(c3324.57,1328.5) S2.3@3366.49,1370.43 ; 3324.57,1387.8 ccw(c3324.57,1447.09) S2.3@3366.49,1405.16 ; 3324.57,1387.8 ccw(c3324.57,1447.09) S2.3@3366.49,1405.16 ; 3324.57,1387.8 cw(c3324.57,1328.5) S2.3@3366.49,1370.43 ; 3324.57,1387.8 ccw(c3324.57,1447.09) S2.3@3366.49,1405.16 ; 3324.57,1387.8 cw(c3324.57,1328.5) S2.3@3366.49,1370.43 ; 3339.05,1387.8 cw(c3339.05,1342.99) S2.3@3370.74,1374.67 ; 3339.05,1387.8 ccw(c3339.05,1432.6) S2.3@3370.74,1400.92 ; 3339.05,1387.8 ccw(c3339.05,1432.6) S2.3@3370.74,1400.92 ; 3339.05,1387.8 cw(c3339.05,1342.99) S2.3@3370.74,1374.67 ; 3339.05,1387.8 ccw(c3339.05,1432.6) S2.3@3370.74,1400.92 ; 3339.05,1387.8 cw(c3339.05,1342.99) S2.3@3370.74,1374.67 ; 3353.54,1387.8 cw(c3353.54,1357.48) S2.3@3374.98,1378.91 ; 3353.54,1387.8 ccw(c3353.54,1418.12) S2.3@3374.98,1396.68 ; 3353.54,1387.8 ccw(c3353.54,1418.12) S2.3@3374.98,1396.68 ; 3353.54,1387.8 cw(c3353.54,1357.48) S2.3@3374.98,1378.91 ; 3353.54,1387.8 ccw(c3353.54,1418.12) S2.3@3374.98,1396.68 ; 3353.54,1387.8 cw(c3353.54,1357.48) S2.3@3374.98,1378.91 ; S2.3@3420.3,1378.91 cw(c3441.74,1357.48) 3441.74,1387.8 ; S2.3@3420.3,1378.91 cw(c3441.74,1357.48) 3441.74,1387.8 ; S2.3@3420.3,1378.91 cw(c3441.74,1357.48) 3441.74,1387.8 ; S2.3@3420.3,1396.68 ccw(c3441.74,1418.12) 3441.74,1387.8 ; S2.3@3420.3,1396.68 ccw(c3441.74,1418.12) 3441.74,1387.8 ; S2.3@3420.3,1396.68 ccw(c3441.74,1418.12) 3441.74,1387.8 ; S2.3@3424.54,1374.67 cw(c3456.22,1342.99) 3456.22,1387.8 ; S2.3@3424.54,1374.67 cw(c3456.22,1342.99) 3456.22,1387.8 ; S2.3@3424.54,1374.67 cw(c3456.22,1342.99) 3456.22,1387.8 ; S2.3@3424.54,1400.92 ccw(c3456.22,1432.6) 3456.22,1387.8 ; S2.3@3424.54,1400.92 ccw(c3456.22,1432.6) 3456.22,1387.8 ; S2.3@3424.54,1400.92 ccw(c3456.22,1432.6) 3456.22,1387.8 ; S2.3@3428.78,1370.43 cw(c3470.71,1328.5) 3470.71,1387.8 ; S2.3@3428.78,1370.43 cw(c3470.71,1328.5) 3470.71,1387.8 ; S2.3@3428.78,1370.43 cw(c3470.71,1328.5) 3470.71,1387.8 ; S2.3@3428.78,1405.16 ccw(c3470.71,1447.09) 3470.71,1387.8 ; S2.3@3428.78,1405.16 ccw(c3470.71,1447.09) 3470.71,1387.8 ; S2.3@3428.78,1405.16 ccw(c3470.71,1447.09) 3470.71,1387.8 ; 3799.22,1251.97 cw(c3764.21,1216.96) P6.46@3813.66,1214.63 ; 3799.21,1251.97 ccw(c3830.07,1282.83) P6.46@3836.35,1239.64 ; 3799.21,1251.97 ccw(c3830.07,1282.83) P6.46@3836.35,1239.64 ; 3799.22,1251.97 cw(c3764.21,1216.96) P6.46@3813.66,1214.63 ; 3799.21,1251.97 ccw(c3830.07,1282.83) P6.46@3836.35,1239.64 ; 3799.22,1251.97 cw(c3764.21,1216.96) P6.46@3813.66,1214.63 ; 3807.67,1243.51 ccw(c3832.22,1268.05) P6.46@3837.21,1233.7 ; 3807.67,1243.51 ccw(c3832.22,1268.05) P6.46@3837.21,1233.7 ; 3807.67,1243.51 ccw(c3832.22,1268.05) P6.46@3837.21,1233.7 ; 3808.81,1242.37 cw(c3782.54,1216.1) P6.46@3819.65,1214.35 ; 3808.81,1242.37 cw(c3782.54,1216.1) P6.46@3819.65,1214.35 ; 3808.81,1242.37 cw(c3782.54,1216.1) P6.46@3819.65,1214.35 ; 3809.29,1234.68 ccw(c3849.12,1243.37) P6.46@3837.45,1204.31 ; 3809.29,1234.68 ccw(c3849.12,1243.37) P6.46@3837.45,1204.31 ; 3809.29,1234.68 ccw(c3849.12,1243.37) P6.46@3837.45,1204.31 ; 3811.45,1224.74 ccw(c3845.79,1232.23) P6.46@3835.73,1198.56 ; 3811.45,1224.74 ccw(c3845.79,1232.23) P6.46@3835.73,1198.56 ; 3811.45,1224.74 ccw(c3845.79,1232.23) P6.46@3835.73,1198.56 ; 3815.68,1232.54 ccw(c3844.18,1238.76) P6.46@3839.61,1209.96 ; 3815.68,1232.54 ccw(c3844.18,1238.76) P6.46@3839.61,1209.96 ; 3815.68,1232.54 ccw(c3844.18,1238.76) P6.46@3839.61,1209.96 ; 3816.14,1235.05 ccw(c3834.36,1253.27) P6.46@3838.07,1227.76 ; 3816.14,1235.05 ccw(c3834.36,1253.27) P6.46@3838.07,1227.76 ; 3816.14,1235.05 ccw(c3834.36,1253.27) P6.46@3838.07,1227.76 ; 3818.83,1241.71 cw(c3812.94,1191.92) P6.46@3852.31,1222.97 ; 3818.83,1241.71 cw(c3812.94,1191.92) P6.46@3852.31,1222.97 ; 3818.83,1241.71 cw(c3812.94,1191.92) P6.46@3852.31,1222.97 ; 3818.96,1235.86 cw(c3814.06,1194.4) P6.46@3847.82,1218.96 ; 3818.96,1235.86 cw(c3814.06,1194.4) P6.46@3847.82,1218.96 ; 3818.96,1235.86 cw(c3814.06,1194.4) P6.46@3847.82,1218.96
PF6: P6.1 R29.1 U5.73 | length 5419.4
  Top Layer w6: v1(2053.94,2026.57) 2332.68,2026.57 2408.28,2102.17 2783.11,2102.17 v1(2815.78,2134.84) ; v1(2054.23,1189.03) 2057.24,1186.02 2115.16,1186.02 R29.1@2158.46,1229.33 ; v1(2816.08,2421.38) 2825.08,2421.38 U5.73@2860.36,2456.66 3565.38,3161.68 3565.38,3290.77 3687.99,3413.39 ; 2833,2430.17 cw(c2837.93,2427.32) U5.73@2838.96,2432.92 ; P6.1@3740.16,3413.39 3687.99,3413.39 ; v1@2056.22,1191.02 ccw(c2068.29,1203.09) 2068.29,1186.02 ; v1@2056.22,1191.02 ccw(c2068.29,1203.09) 2068.29,1186.02 ; v1@2056.22,1191.02 ccw(c2068.29,1203.09) 2068.29,1186.02 ; v1@2060.17,2020.34 cw(c2075.21,2005.3) 2075.21,2026.57 ; v1@2060.17,2020.34 cw(c2075.21,2005.3) 2075.21,2026.57 ; v1@2060.17,2020.34 cw(c2075.21,2005.3) 2075.21,2026.57 ; v1@2060.17,2032.81 ccw(c2075.21,2047.85) 2075.21,2026.57 ; v1@2060.17,2032.81 ccw(c2075.21,2047.85) 2075.21,2026.57 ; v1@2060.17,2032.81 ccw(c2075.21,2047.85) 2075.21,2026.57 ; v1@2060.46,1182.8 cw(c2068.24,1175.03) 2068.24,1186.02 ; v1@2060.46,1182.8 cw(c2068.24,1175.03) 2068.24,1186.02 ; v1@2060.46,1182.8 cw(c2068.24,1175.03) 2068.24,1186.02 ; v1@2060.46,1195.26 ccw(c2082.77,1217.57) 2082.77,1186.02 ; v1@2060.46,1195.26 ccw(c2082.77,1217.57) 2082.77,1186.02 ; v1@2060.46,1195.26 ccw(c2082.77,1217.57) 2082.77,1186.02 ; 2129.98,1200.85 cw(c2158.46,1172.36) R29.1@2158.46,1212.65 ; 2129.98,1200.85 cw(c2158.46,1172.36) R29.1@2158.46,1212.65 ; 2129.98,1200.85 cw(c2158.46,1172.36) R29.1@2158.46,1212.65 ; 2134.73,1205.6 ccw(c2112.97,1227.36) R29.1@2143.75,1227.36 ; 2134.73,1205.6 ccw(c2112.97,1227.36) R29.1@2143.75,1227.36 ; 2134.73,1205.6 ccw(c2112.97,1227.36) R29.1@2143.75,1227.36 ; 2140.22,1211.09 cw(c2158.46,1192.85) R29.1@2158.46,1218.65 ; 2140.22,1211.09 cw(c2158.46,1192.85) R29.1@2158.46,1218.65 ; 2140.22,1211.09 cw(c2158.46,1192.85) R29.1@2158.46,1218.65 ; 2140.4,1214.85 cw(c2161.26,1209.26) R29.1@2157.96,1230.61 ; 2140.4,1214.85 cw(c2161.26,1209.26) R29.1@2157.96,1230.61 ; 2140.4,1214.85 cw(c2161.26,1209.26) R29.1@2157.96,1230.61 ; 2144.16,1208.81 ccw(c2137.79,1232.58) R29.1@2161.65,1226.56 ; 2144.16,1208.81 ccw(c2137.79,1232.58) R29.1@2161.65,1226.56 ; 2144.16,1208.81 ccw(c2137.79,1232.58) R29.1@2161.65,1226.56 ; R29.1@2144.98,1215.84 ccw(c2133.46,1227.36) R29.1@2149.75,1227.36 ; R29.1@2144.98,1215.84 ccw(c2133.46,1227.36) R29.1@2149.75,1227.36 ; R29.1@2144.98,1215.84 ccw(c2133.46,1227.36) R29.1@2149.75,1227.36 ; 2800.74,2119.8 cw(c2815.78,2104.76) v1@2815.78,2126.03 ; 2800.74,2119.8 ccw(c2785.7,2134.84) v1@2806.97,2134.84 ; 2800.74,2119.8 ccw(c2785.7,2134.84) v1@2806.97,2134.84 ; 2800.74,2119.8 cw(c2815.78,2104.76) v1@2815.78,2126.03 ; 2800.74,2119.8 ccw(c2785.7,2134.84) v1@2806.97,2134.84 ; 2800.74,2119.8 cw(c2815.78,2104.76) v1@2815.78,2126.03 ; 2805.33,2128.73 cw(c2817.72,2125.41) v1@2815.14,2137.97 ; 2805.33,2128.73 cw(c2817.72,2125.41) v1@2815.14,2137.97 ; 2805.33,2128.73 cw(c2817.72,2125.41) v1@2815.14,2137.97 ; 2809.67,2124.39 ccw(c2806.35,2136.77) v1@2818.91,2134.2 ; 2809.67,2124.39 ccw(c2806.35,2136.77) v1@2818.91,2134.2 ; 2809.67,2124.39 ccw(c2806.35,2136.77) v1@2818.91,2134.2 ; v1@2816.08,2424.19 ccw(c2816.08,2452.69) U5.73@2836.23,2432.54 ; v1@2816.08,2424.19 ccw(c2816.08,2452.69) U5.73@2836.23,2432.54 ; v1@2816.08,2424.19 ccw(c2816.08,2452.69) U5.73@2836.23,2432.54 ; v1@2816.08,2430.19 ccw(c2816.08,2473.17) U5.73@2846.48,2442.78 ; v1@2816.08,2430.19 ccw(c2816.08,2473.17) U5.73@2846.48,2442.78 ; v1@2816.08,2430.19 ccw(c2816.08,2473.17) U5.73@2846.48,2442.78 ; v1@2820.49,2429.01 ccw(c2826.49,2439.4) 2829.59,2427.81 ; v1@2820.49,2429.01 ccw(c2826.49,2439.4) 2829.59,2427.81 ; v1@2820.49,2429.01 ccw(c2826.49,2439.4) 2829.59,2427.81 ; 2828.49,2432.39 cw(c2834.15,2422.58) U5.73@2838.39,2433.09 ; 2828.49,2432.39 cw(c2834.15,2422.58) U5.73@2838.39,2433.09 ; 2828.49,2432.39 cw(c2834.15,2422.58) U5.73@2838.39,2433.09 ; 2831.52,2429.81 ccw(c2825.98,2439.4) U5.73@2836.67,2436.53 ; 2831.52,2429.81 ccw(c2825.98,2439.4) U5.73@2836.67,2436.53 ; 2831.52,2429.81 ccw(c2825.98,2439.4) U5.73@2836.67,2436.53 ; 2834.52,2430.82 cw(c2839.48,2425.86) U5.73@2839.48,2432.88 ; 2834.52,2430.82 ccw(c2829.56,2435.78) U5.73@2836.57,2435.78 ; 2834.52,2430.82 ccw(c2829.56,2435.78) U5.73@2836.57,2435.78 ; 2834.52,2430.82 cw(c2839.48,2425.86) U5.73@2839.48,2432.88 ; 2834.52,2430.82 ccw(c2829.56,2435.78) U5.73@2836.57,2435.78 ; 2834.52,2430.82 cw(c2839.48,2425.86) U5.73@2839.48,2432.88 ; U5.73@2881.24,2480.45 ccw(c2881.24,2487.46) 2886.2,2482.5 ; U5.73@2881.24,2480.45 ccw(c2881.24,2487.46) 2886.2,2482.5 ; U5.73@2881.24,2480.45 ccw(c2881.24,2487.46) 2886.2,2482.5 ; U5.73@2884.14,2477.54 cw(c2891.16,2477.54) 2886.2,2482.5 ; U5.73@2884.14,2477.54 cw(c2891.16,2477.54) 2886.2,2482.5 ; U5.73@2884.14,2477.54 cw(c2891.16,2477.54) 2886.2,2482.5 ; 3687.99,3413.39 cw(c3687.99,3375.36) P6.1@3718.72,3397.76 ; 3687.99,3413.39 ccw(c3687.99,3451.41) P6.1@3718.72,3429.01 ; 3687.99,3413.39 ccw(c3687.99,3451.41) P6.1@3718.72,3429.01 ; 3687.99,3413.39 cw(c3687.99,3375.36) P6.1@3718.72,3397.76 ; 3687.99,3413.39 ccw(c3687.99,3451.41) P6.1@3718.72,3429.01 ; 3687.99,3413.39 cw(c3687.99,3375.36) P6.1@3718.72,3397.76 ; 3699.79,3413.39 cw(c3699.79,3383.96) P6.1@3723.57,3401.29 ; 3699.79,3413.39 ccw(c3699.79,3442.81) P6.1@3723.57,3425.48 ; 3699.79,3413.39 ccw(c3699.79,3442.81) P6.1@3723.57,3425.48 ; 3699.79,3413.39 cw(c3699.79,3383.96) P6.1@3723.57,3401.29 ; 3699.79,3413.39 ccw(c3699.79,3442.81) P6.1@3723.57,3425.48 ; 3699.79,3413.39 cw(c3699.79,3383.96) P6.1@3723.57,3401.29
  Bottom Layer w6: v1(2053.94,2026.57) 2053.94,1189.33 v1(2054.23,1189.03) ; v1(2815.78,2134.84) 2816.08,2135.14 v1(2816.08,2421.38) ; v1@2047.71,2020.34 cw(c2032.67,2005.3) 2053.94,2005.3 ; v1@2047.71,2020.34 cw(c2032.67,2005.3) 2053.94,2005.3 ; v1@2047.71,2020.34 cw(c2032.67,2005.3) 2053.94,2005.3 ; v1@2048,1195.26 ccw(c2033.68,1209.59) 2053.94,1209.59 ; v1@2048,1195.26 ccw(c2033.68,1209.59) 2053.94,1209.59 ; v1@2048,1195.26 ccw(c2033.68,1209.59) 2053.94,1209.59 ; 2053.94,1211.02 ccw(c2076.22,1211.02) v1@2060.46,1195.26 ; 2053.94,1211.02 ccw(c2076.22,1211.02) v1@2060.46,1195.26 ; 2053.94,1211.02 ccw(c2076.22,1211.02) v1@2060.46,1195.26 ; 2053.94,2005.3 cw(c2075.21,2005.3) v1@2060.17,2020.34 ; 2053.94,2005.3 cw(c2075.21,2005.3) v1@2060.17,2020.34 ; 2053.94,2005.3 cw(c2075.21,2005.3) v1@2060.17,2020.34 ; v1@2809.55,2141.07 ccw(c2793.79,2156.83) 2816.08,2156.83 ; v1@2809.55,2141.07 ccw(c2793.79,2156.83) 2816.08,2156.83 ; v1@2809.55,2141.07 ccw(c2793.79,2156.83) 2816.08,2156.83 ; v1@2809.85,2415.15 cw(c2794.81,2400.11) 2816.08,2400.11 ; v1@2809.85,2415.15 cw(c2794.81,2400.11) 2816.08,2400.11 ; v1@2809.85,2415.15 cw(c2794.81,2400.11) 2816.08,2400.11 ; 2816.08,2155.39 ccw(c2836.34,2155.39) v1@2822.01,2141.07 ; 2816.08,2155.39 ccw(c2836.34,2155.39) v1@2822.01,2141.07 ; 2816.08,2155.39 ccw(c2836.34,2155.39) v1@2822.01,2141.07 ; 2816.08,2400.11 cw(c2837.35,2400.11) v1@2822.31,2415.15 ; 2816.08,2400.11 cw(c2837.35,2400.11) v1@2822.31,2415.15 ; 2816.08,2400.11 cw(c2837.35,2400.11) v1@2822.31,2415.15
PF9: P7.35 R31.1 U5.10 | length 3786.1
  Top Layer w6: P7.35@1476.38,1624.02 1518.7,1666.34 ; U5.10@2537.43,1938.86 2462.74,1864.17 2344.49,1864.17 2248.03,1767.72 2248.03,1423.86 2189.33,1365.16 ; P7.35@1461.7,1628.91 cw(c1496.01,1617.47) 1488.37,1652.82 ; P7.35@1461.7,1628.91 cw(c1496.01,1617.47) 1488.37,1652.82 ; P7.35@1461.7,1628.91 cw(c1496.01,1617.47) 1488.37,1652.82 ; P7.35@1467.39,1627.01 cw(c1507.61,1613.6) 1498.66,1655.04 ; P7.35@1467.39,1627.01 cw(c1507.61,1613.6) 1498.66,1655.04 ; P7.35@1467.39,1627.01 cw(c1507.61,1613.6) 1498.66,1655.04 ; P7.35@1472.97,1624.7 cw(c1503.09,1618.64) 1496.6,1648.67 ; P7.35@1472.97,1624.7 cw(c1503.09,1618.64) 1496.6,1648.67 ; P7.35@1472.97,1624.7 cw(c1503.09,1618.64) 1496.6,1648.67 ; P7.35@1477.06,1620.61 ccw(c1471.01,1650.73) 1501.03,1644.24 ; P7.35@1477.06,1620.61 ccw(c1471.01,1650.73) 1501.03,1644.24 ; P7.35@1477.06,1620.61 ccw(c1471.01,1650.73) 1501.03,1644.24 ; P7.35@1477.09,1638.53 ccw(c1478.55,1668.2) 1499.55,1647.19 ; P7.35@1477.09,1638.53 ccw(c1478.55,1668.2) 1499.55,1647.19 ; P7.35@1477.09,1638.53 ccw(c1478.55,1668.2) 1499.55,1647.19 ; P7.35@1477.38,1644.52 ccw(c1479.44,1686.45) 1509.13,1656.76 ; P7.35@1477.38,1644.52 ccw(c1479.44,1686.45) 1509.13,1656.76 ; P7.35@1477.38,1644.52 ccw(c1479.44,1686.45) 1509.13,1656.76 ; P7.35@1477.68,1650.51 ccw(c1480.34,1704.7) 1518.7,1666.34 ; P7.35@1477.68,1650.51 ccw(c1480.34,1704.7) 1518.7,1666.34 ; P7.35@1477.68,1650.51 ccw(c1480.34,1704.7) 1518.7,1666.34 ; P7.35@1479.37,1615.03 ccw(c1465.97,1655.25) 1507.41,1646.3 ; P7.35@1479.37,1615.03 ccw(c1465.97,1655.25) 1507.41,1646.3 ; P7.35@1479.37,1615.03 ccw(c1465.97,1655.25) 1507.41,1646.3 ; P7.35@1481.27,1609.34 ccw(c1469.84,1643.65) 1505.18,1636.01 ; P7.35@1481.27,1609.34 ccw(c1469.84,1643.65) 1505.18,1636.01 ; P7.35@1481.27,1609.34 ccw(c1469.84,1643.65) 1505.18,1636.01 ; P7.35@1490.89,1624.73 cw(c1520.56,1626.18) 1499.55,1647.19 ; P7.35@1490.89,1624.73 cw(c1520.56,1626.18) 1499.55,1647.19 ; P7.35@1490.89,1624.73 cw(c1520.56,1626.18) 1499.55,1647.19 ; P7.35@1496.88,1625.02 cw(c1538.81,1627.08) 1509.13,1656.76 ; P7.35@1496.88,1625.02 cw(c1538.81,1627.08) 1509.13,1656.76 ; P7.35@1496.88,1625.02 cw(c1538.81,1627.08) 1509.13,1656.76 ; P7.35@1502.87,1625.32 cw(c1557.06,1627.97) 1518.7,1666.34 ; P7.35@1502.87,1625.32 cw(c1557.06,1627.97) 1518.7,1666.34 ; P7.35@1502.87,1625.32 cw(c1557.06,1627.97) 1518.7,1666.34 ; 1518.7,1666.34 1605.32,1666.34 1624.02,1647.64 1624.02,1594.49 1716.87,1501.63 1716.87,1371.11 1756.29,1331.69 2124.14,1331.69 R31.1@2157.61,1365.16 2189.33,1365.16 ; 2129.12,1336.67 cw(c2157.61,1308.19) R31.1@2157.61,1348.47 ; 2129.12,1336.67 cw(c2157.61,1308.19) R31.1@2157.61,1348.47 ; 2129.12,1336.67 cw(c2157.61,1308.19) R31.1@2157.61,1348.47 ; 2133.88,1341.43 ccw(c2112.11,1363.19) R31.1@2142.89,1363.19 ; 2133.88,1341.43 ccw(c2112.11,1363.19) R31.1@2142.89,1363.19 ; 2133.88,1341.43 ccw(c2112.11,1363.19) R31.1@2142.89,1363.19 ; 2139.37,1346.92 cw(c2157.61,1328.68) R31.1@2157.61,1354.47 ; 2139.37,1346.92 cw(c2157.61,1328.68) R31.1@2157.61,1354.47 ; 2139.37,1346.92 cw(c2157.61,1328.68) R31.1@2157.61,1354.47 ; 2139.54,1350.68 cw(c2160.4,1345.09) R31.1@2157.11,1366.43 ; 2139.54,1350.68 cw(c2160.4,1345.09) R31.1@2157.11,1366.43 ; 2139.54,1350.68 cw(c2160.4,1345.09) R31.1@2157.11,1366.43 ; 2143.3,1344.64 ccw(c2136.93,1368.41) R31.1@2160.79,1362.39 ; 2143.3,1344.64 ccw(c2136.93,1368.41) R31.1@2160.79,1362.39 ; 2143.3,1344.64 ccw(c2136.93,1368.41) R31.1@2160.79,1362.39 ; R31.1@2144.12,1351.67 ccw(c2132.6,1363.19) R31.1@2148.89,1363.19 ; R31.1@2144.12,1351.67 ccw(c2132.6,1363.19) R31.1@2148.89,1363.19 ; R31.1@2144.12,1351.67 ccw(c2132.6,1363.19) R31.1@2148.89,1363.19 ; R31.1@2164.26,1359.53 cw(c2176.4,1349.27) 2176.4,1365.16 ; R31.1@2164.26,1359.53 cw(c2176.4,1349.27) 2176.4,1365.16 ; R31.1@2164.26,1359.53 cw(c2176.4,1349.27) 2176.4,1365.16 ; R31.1@2164.26,1370.79 ccw(c2176.4,1381.05) 2176.4,1365.16 ; R31.1@2164.26,1370.79 ccw(c2176.4,1381.05) 2176.4,1365.16 ; R31.1@2164.26,1370.79 ccw(c2176.4,1381.05) 2176.4,1365.16 ; R31.1@2168.84,1355.65 cw(c2189.33,1338.33) 2189.33,1365.16 ; R31.1@2168.84,1355.65 cw(c2189.33,1338.33) 2189.33,1365.16 ; R31.1@2168.84,1355.65 cw(c2189.33,1338.33) 2189.33,1365.16 ; R31.1@2168.84,1374.66 ccw(c2189.33,1391.99) 2189.33,1365.16 ; R31.1@2168.84,1374.66 ccw(c2189.33,1391.99) 2189.33,1365.16 ; R31.1@2168.84,1374.66 ccw(c2189.33,1391.99) 2189.33,1365.16 ; 2511.59,1913.02 cw(c2516.55,1908.06) U5.10@2516.55,1915.07 ; 2511.59,1913.02 ccw(c2506.63,1917.98) U5.10@2513.64,1917.98 ; 2511.59,1913.02 ccw(c2506.63,1917.98) U5.10@2513.64,1917.98 ; 2511.59,1913.02 cw(c2516.55,1908.06) U5.10@2516.55,1915.07 ; 2511.59,1913.02 ccw(c2506.63,1917.98) U5.10@2513.64,1917.98 ; 2511.59,1913.02 cw(c2516.55,1908.06) U5.10@2516.55,1915.07
PF10: P7.36 R32.1 U5.11 | length 4160.7
  Top Layer w6: P7.36@1576.38,1624.02 1576.38,1617.76 1704.87,1489.26 1704.87,1295.12 1736.07,1263.92 1738.94,1263.92 1739.08,1263.78 2125.13,1263.78 R32.1@2158.59,1297.24 2184.29,1297.24 ; U5.11@2551.35,1924.94 2477.79,1851.38 2348.66,1851.38 2260.03,1762.75 2260.03,1372.98 2184.29,1297.24 ; P7.36@1561,1622.27 ccw(c1592.29,1625.83) 1584.14,1595.41 ; P7.36@1561,1622.27 ccw(c1592.29,1625.83) 1584.14,1595.41 ; P7.36@1561,1622.27 ccw(c1592.29,1625.83) 1584.14,1595.41 ; P7.36@1566.97,1622.95 ccw(c1601.7,1626.9) 1592.65,1593.13 ; P7.36@1566.97,1622.95 ccw(c1601.7,1626.9) 1592.65,1593.13 ; P7.36@1566.97,1622.95 ccw(c1601.7,1626.9) 1592.65,1593.13 ; P7.36@1572.93,1623.62 ccw(c1611.11,1627.97) 1601.16,1590.85 ; P7.36@1572.93,1623.62 ccw(c1611.11,1627.97) 1601.16,1590.85 ; P7.36@1572.93,1623.62 ccw(c1611.11,1627.97) 1601.16,1590.85 ; P7.36@1575.93,1621.53 cw(c1569.43,1585.64) 1604.66,1595.08 ; P7.36@1575.93,1621.53 cw(c1569.43,1585.64) 1604.66,1595.08 ; P7.36@1575.93,1621.53 cw(c1569.43,1585.64) 1604.66,1595.08 ; P7.36@1576.2,1615.49 cw(c1575.71,1592.72) 1597.71,1598.62 ; P7.36@1576.2,1615.49 cw(c1575.71,1592.72) 1597.71,1598.62 ; P7.36@1576.2,1615.49 cw(c1575.71,1592.72) 1597.71,1598.62 ; P7.36@1576.38,1597.49 cw(c1576.38,1548.55) 1610.98,1583.16 ; P7.36@1576.38,1597.49 cw(c1576.38,1548.55) 1610.98,1583.16 ; P7.36@1576.38,1597.49 cw(c1576.38,1548.55) 1610.98,1583.16 ; P7.36@1576.38,1603.49 cw(c1576.38,1569.04) 1600.74,1593.4 ; P7.36@1576.38,1603.49 cw(c1576.38,1569.04) 1600.74,1593.4 ; P7.36@1576.38,1603.49 cw(c1576.38,1569.04) 1600.74,1593.4 ; P7.36@1577,1627.43 cw(c1571.3,1595.94) 1602.21,1604.23 ; P7.36@1577,1627.43 cw(c1571.3,1595.94) 1602.21,1604.23 ; P7.36@1577,1627.43 cw(c1571.3,1595.94) 1602.21,1604.23 ; P7.36@1577.37,1627.34 cw(c1563.24,1579.93) 1611.12,1592.37 ; P7.36@1577.37,1627.34 cw(c1563.24,1579.93) 1611.12,1592.37 ; P7.36@1577.37,1627.34 cw(c1563.24,1579.93) 1611.12,1592.37 ; P7.36@1579.08,1633.09 cw(c1566.79,1591.85) 1608.45,1602.66 ; P7.36@1579.08,1633.09 cw(c1566.79,1591.85) 1608.45,1602.66 ; P7.36@1579.08,1633.09 cw(c1566.79,1591.85) 1608.45,1602.66 ; P7.36@1580.8,1638.84 cw(c1570.34,1603.76) 1605.78,1612.96 ; P7.36@1580.8,1638.84 cw(c1570.34,1603.76) 1605.78,1612.96 ; P7.36@1580.8,1638.84 cw(c1570.34,1603.76) 1605.78,1612.96 ; P7.36@1584.91,1624.02 ccw(c1620.6,1624.02) 1595.36,1598.78 ; P7.36@1584.91,1624.02 ccw(c1620.6,1624.02) 1595.36,1598.78 ; P7.36@1584.91,1624.02 ccw(c1620.6,1624.02) 1595.36,1598.78 ; P7.36@1590.91,1624.02 ccw(c1641.09,1624.02) 1605.6,1588.53 ; P7.36@1590.91,1624.02 ccw(c1641.09,1624.02) 1605.6,1588.53 ; P7.36@1590.91,1624.02 ccw(c1641.09,1624.02) 1605.6,1588.53 ; P7.36@1596.91,1624.02 ccw(c1661.57,1624.02) 1615.85,1578.29 ; P7.36@1596.91,1624.02 ccw(c1661.57,1624.02) 1615.85,1578.29 ; P7.36@1596.91,1624.02 ccw(c1661.57,1624.02) 1615.85,1578.29 ; 1597.74,1598.51 cw(c1613.32,1602.69) P7.36@1599.35,1610.75 ; 1597.74,1598.51 cw(c1613.32,1602.69) P7.36@1599.35,1610.75 ; 1597.74,1598.51 cw(c1613.32,1602.69) P7.36@1599.35,1610.75 ; P7.36@1602.91,1624.02 ccw(c1682.06,1624.02) 1626.09,1568.05 ; P7.36@1602.91,1624.02 ccw(c1682.06,1624.02) 1626.09,1568.05 ; P7.36@1602.91,1624.02 ccw(c1682.06,1624.02) 1626.09,1568.05 ; 2130.11,1268.76 cw(c2158.59,1240.28) R32.1@2158.59,1280.56 ; 2130.11,1268.76 cw(c2158.59,1240.28) R32.1@2158.59,1280.56 ; 2130.11,1268.76 cw(c2158.59,1240.28) R32.1@2158.59,1280.56 ; 2134.86,1273.51 ccw(c2113.1,1295.28) R32.1@2143.87,1295.28 ; 2134.86,1273.51 ccw(c2113.1,1295.28) R32.1@2143.87,1295.28 ; 2134.86,1273.51 ccw(c2113.1,1295.28) R32.1@2143.87,1295.28 ; 2140.35,1279 cw(c2158.59,1260.76) R32.1@2158.59,1286.56 ; 2140.35,1279 cw(c2158.59,1260.76) R32.1@2158.59,1286.56 ; 2140.35,1279 cw(c2158.59,1260.76) R32.1@2158.59,1286.56 ; 2140.52,1282.77 cw(c2161.38,1277.17) R32.1@2158.09,1298.52 ; 2140.52,1282.77 cw(c2161.38,1277.17) R32.1@2158.09,1298.52 ; 2140.52,1282.77 cw(c2161.38,1277.17) R32.1@2158.09,1298.52 ; 2144.28,1276.73 ccw(c2137.92,1300.49) R32.1@2161.77,1294.47 ; 2144.28,1276.73 ccw(c2137.92,1300.49) R32.1@2161.77,1294.47 ; 2144.28,1276.73 ccw(c2137.92,1300.49) R32.1@2161.77,1294.47 ; R32.1@2145.1,1283.76 ccw(c2133.58,1295.28) R32.1@2149.87,1295.28 ; R32.1@2145.1,1283.76 ccw(c2133.58,1295.28) R32.1@2149.87,1295.28 ; R32.1@2145.1,1283.76 ccw(c2133.58,1295.28) R32.1@2149.87,1295.28 ; R32.1@2171.28,1289.79 cw(c2184.29,1282.16) 2184.29,1297.24 ; R32.1@2171.28,1289.79 cw(c2184.29,1282.16) 2184.29,1297.24 ; R32.1@2171.28,1289.79 cw(c2184.29,1282.16) 2184.29,1297.24 ; R32.1@2171.28,1304.69 ccw(c2184.29,1312.33) 2184.29,1297.24 ; R32.1@2171.28,1304.69 ccw(c2184.29,1312.33) 2184.29,1297.24 ; R32.1@2171.28,1304.69 ccw(c2184.29,1312.33) 2184.29,1297.24 ; 2525.51,1899.1 cw(c2530.47,1894.14) U5.11@2530.47,1901.15 ; 2525.51,1899.1 ccw(c2520.55,1904.06) U5.11@2527.56,1904.06 ; 2525.51,1899.1 ccw(c2520.55,1904.06) U5.11@2527.56,1904.06 ; 2525.51,1899.1 cw(c2530.47,1894.14) U5.11@2530.47,1901.15 ; 2525.51,1899.1 ccw(c2520.55,1904.06) U5.11@2527.56,1904.06 ; 2525.51,1899.1 cw(c2530.47,1894.14) U5.11@2530.47,1901.15
PWR_ENN: P3.3 U3.28 | length 2134.8
  Top Layer w6: 1091.54,1565.94 1151.38,1565.94 P3.3@1232.28,1485.04 ; 1187,1530.32 cw(c1141.71,1485.04) P3.3@1205.76,1485.04 ; 1187,1530.32 ccw(c1232.28,1575.61) P3.3@1232.28,1511.57 ; 1187,1530.32 ccw(c1232.28,1575.61) P3.3@1232.28,1511.57 ; 1187,1530.32 cw(c1141.71,1485.04) P3.3@1205.76,1485.04 ; 1187,1530.32 ccw(c1232.28,1575.61) P3.3@1232.28,1511.57 ; 1187,1530.32 cw(c1141.71,1485.04) P3.3@1205.76,1485.04 ; 1197.24,1520.08 cw(c1162.2,1485.04) P3.3@1211.76,1485.04 ; 1197.24,1520.08 ccw(c1232.28,1555.12) P3.3@1232.28,1505.57 ; 1197.24,1520.08 ccw(c1232.28,1555.12) P3.3@1232.28,1505.57 ; 1197.24,1520.08 cw(c1162.2,1485.04) P3.3@1211.76,1485.04 ; 1197.24,1520.08 ccw(c1232.28,1555.12) P3.3@1232.28,1505.57 ; 1197.24,1520.08 cw(c1162.2,1485.04) P3.3@1211.76,1485.04 ; 1204.29,1519.07 cw(c1193.02,1477) P3.3@1235.69,1485.74 ; 1204.29,1519.07 cw(c1193.02,1477) P3.3@1235.69,1485.74 ; 1204.29,1519.07 cw(c1193.02,1477) P3.3@1235.69,1485.74 ; 1204.98,1510.33 ccw(c1234.76,1518.31) P3.3@1232.47,1487.56 ; 1204.98,1510.33 ccw(c1234.76,1518.31) P3.3@1232.47,1487.56 ; 1204.98,1510.33 ccw(c1234.76,1518.31) P3.3@1232.47,1487.56 ; 1206.99,1512.34 cw(c1199.01,1482.56) P3.3@1229.76,1484.85 ; 1206.99,1512.34 cw(c1199.01,1482.56) P3.3@1229.76,1484.85 ; 1206.99,1512.34 cw(c1199.01,1482.56) P3.3@1229.76,1484.85 ; 1207.17,1502.16 ccw(c1234.1,1509.38) P3.3@1232.03,1481.58 ; 1207.17,1502.16 ccw(c1234.1,1509.38) P3.3@1232.03,1481.58 ; 1207.17,1502.16 ccw(c1234.1,1509.38) P3.3@1232.03,1481.58 ; 1207.48,1509.84 cw(c1182.68,1485.04) P3.3@1217.76,1485.04 ; 1207.48,1509.84 ccw(c1232.28,1534.64) P3.3@1232.28,1499.57 ; 1207.48,1509.84 ccw(c1232.28,1534.64) P3.3@1232.28,1499.57 ; 1207.48,1509.84 cw(c1182.68,1485.04) P3.3@1217.76,1485.04 ; 1207.48,1509.84 ccw(c1232.28,1534.64) P3.3@1232.28,1499.57 ; 1207.48,1509.84 cw(c1182.68,1485.04) P3.3@1217.76,1485.04 ; 1213.67,1516.55 cw(c1203.65,1479.18) P3.3@1241.56,1486.94 ; 1213.67,1516.55 cw(c1203.65,1479.18) P3.3@1241.56,1486.94 ; 1213.67,1516.55 cw(c1203.65,1479.18) P3.3@1241.56,1486.94 ; 1215.16,1510.16 cw(c1207.94,1483.22) P3.3@1235.75,1485.3 ; 1215.16,1510.16 cw(c1207.94,1483.22) P3.3@1235.75,1485.3 ; 1215.16,1510.16 cw(c1207.94,1483.22) P3.3@1235.75,1485.3 ; 1223.05,1514.04 cw(c1214.29,1481.35) P3.3@1247.44,1488.14 ; 1223.05,1514.04 cw(c1214.29,1481.35) P3.3@1247.44,1488.14 ; 1223.05,1514.04 cw(c1214.29,1481.35) P3.3@1247.44,1488.14
  Top Layer w7: U3.28@710.63,1549.21 710.63,1522.27 727,1505.91 899.57,1505.91 959.61,1565.94 1091.54,1565.94